# EAGLE board Stunning Snicket (EAGLE 7.6.0)

Size 73.58 x 63.39 mm. Coordinates in mm from the lower left corner, seen from the top.
Outline: 0,0 56.82,0 56.82,53.33 0,53.33 0,0
Copper layers (1*16): Top 0.035mm / dielectric 1.5mm / Bottom 0.035mm
Design rules "default": minimum track width 10mil, minimum drill 24mil, track to track 8mil, track to pad 8mil, pad to pad 8mil, via to via 8mil, smd to smd 8mil, copper to edge 40mil, drill to drill 8mil, minimum pad ring 10mil, minimum via ring 8mil, stop-mask expansion 4mil, vias tented up to drill 0mil, thermal gap 10mil

## Footprints (pad centres in the part's own frame; a part is rotated, then mirrored left to right if it is on the bottom)
LED5MM = drill 0.813 octagon: A -1.27,0; K 1.27,0
0207/10 = drill 0.813 octagon: 1 -5.08,0; 2 5.08,0
DIP04YL = drill 0.813 long: 1 -3.81,-3.81; 2 -1.27,-3.81; 3 1.27,-3.81; 4 3.81,-3.81; 5 3.81,3.81; 6 1.27,3.81; 7 -1.27,3.81; 8 -3.81,3.81
ARDUINO_UNO = drill 1.016 pad 1.88: 0 63.5,50.8; 1 60.96,50.8; 2 58.42,50.8; 3 55.88,50.8; 3.3V 35.56,2.54; 4 53.34,50.8; 5 50.8,50.8; 5V 38.1,2.54; 6 48.26,50.8; 7 45.72,50.8; 8 41.656,50.8; 9 39.116,50.8; 10 36.576,50.8; 11 34.036,50.8; 12 31.496,50.8; 13 28.956,50.8; A0 50.8,2.54; A1 53.34,2.54; A2 55.88,2.54; A3 58.42,2.54; A4 60.96,2.54; A5 63.5,2.54; AREF 23.876,50.8; GND 26.416,50.8; GND. 43.18,2.54; GND.. 40.64,2.54; I/OREF 30.48,2.54; N/C 27.94,2.54; RESET 33.02,2.54; SCL 18.796,50.8; SDA 21.336,50.8; VIN 45.72,2.54 | hole 3.2: 66.04,7.62; 66.04,35.56; 15.24,50.8; 13.97,2.54
DIL14 = drill 0.813 long: 1 -7.62,-3.81; 2 -5.08,-3.81; 3 -2.54,-3.81; 4 0,-3.81; 5 2.54,-3.81; 6 5.08,-3.81; 7 7.62,-3.81; 8 7.62,3.81; 9 5.08,3.81; 10 2.54,3.81; 11 0,3.81; 12 -2.54,3.81; 13 -5.08,3.81; 14 -7.62,3.81

## Placement (x,y rotation side)
D1  [LED5MM]  5,162.48 0 top  (outside the outline)
D2  [LED5MM]  5,175.18 0 top  (outside the outline)
R1  1k‎Ω  [0207/10]  5,73.58 0 top  (outside the outline)
R2  1k‎Ω  [0207/10]  5,86.28 0 top  (outside the outline)
R3  1k‎Ω  [0207/10]  5,98.98 0 top  (outside the outline)
R4  1k‎Ω  [0207/10]  5,111.68 0 top  (outside the outline)
R5  220‎Ω  [0207/10]  5,137.08 0 top  (outside the outline)
R6  220‎Ω  [0207/10]  5,149.78 0 top  (outside the outline)
R7  1k‎Ω  [0207/10]  5,187.88 0 top  (outside the outline)
R8  1k‎Ω  [0207/10]  5,200.58 0 top  (outside the outline)
R9  1k‎Ω  [0207/10]  5,213.28 0 top  (outside the outline)
R10  1k‎Ω  [0207/10]  5,225.98 0 top  (outside the outline)
R11  1k‎Ω  [0207/10]  5,238.68 0 top  (outside the outline)
SW1  [DIP04YL]  5,22.78 0 top
SW2  [DIP04YL]  5,35.48 0 top
U4  [ARDUINO_UNO]  5,10.08 0 top
U5  [DIL14]  5,48.18 0 top
U6  [DIL14]  5,60.88 0 top
U7  [DIL14]  5,124.38 0 top  (outside the outline)

## Library data of the parts
D1 D2 R1-R11 SW1 SW2 U4-U7 = AUTODESK_CIRCUITS_BREADBOARD

## Nets
N$1: R1.1 SW1.8 U5.1
N$2: R4.1 SW1.5
N$3: R3.1 SW1.6
N$4: R2.1 SW1.7 U5.2
N$5: U5.13
N$6: R5.1 U5.6 U6.2
N$7: U5.10
N$8: U5.8
N$9: U5.12
N$10: U5.9
N$11: R6.2 U5.4 U6.5
N$12: U5.11
N$13: U5.3 U5.5
N$14: U6.13
N$15: U6.6
N$16: U6.9
N$17: U6.8
N$18: U6.10
N$19: U6.11
N$20: U6.12
N$21: D1.K R5.2
N$22: U7.3 U7.5
N$23: U7.13
N$24: D1.A D2.A SW1.1 SW1.2 SW1.3 SW1.4 SW2.1 SW2.2 SW2.3 SW2.4 U4.GND.. U5.7 U6.7 U7.7
N$25: U7.9
N$26: U7.12
N$27: U7.8
N$28: U7.10
N$29: R11.1 U6.3 U7.2 U7.6
N$30: U7.11
N$31: D2.K R6.1
N$32: R7.1 SW2.8 U7.1
N$33: R10.1 SW2.5
N$34: R9.1 SW2.6
N$35: R8.1 SW2.7 U7.4
N$36: R1.2 R2.2 R3.2 R4.2 R7.2 R8.2 R9.2 R10.2 U4.5V U5.14 U6.1 U6.4 U6.14 U7.14
N$37: R11.2

## Tracks (layer width: path | path; a pad name or v marks a point on that pad's centre or on a via)
N$1  (2 unrouted)
N$2  (1 unrouted)
N$3  (1 unrouted)
N$4  (2 unrouted)
N$6  (2 unrouted)
N$11  (2 unrouted)
N$13  (1 unrouted)
N$21  (1 unrouted)
N$22  (1 unrouted)
N$24  (13 unrouted)
N$29  (3 unrouted)
N$31  (1 unrouted)
N$32  (2 unrouted)
N$33  (1 unrouted)
N$34  (1 unrouted)
N$35  (2 unrouted)
N$36  (13 unrouted)